# EAGLE board Simple-Bug-2N918 (EAGLE 7.7.0)
Simple FM Transmitter with Electret Microphone, using 2N918, an RF NPN Transistor
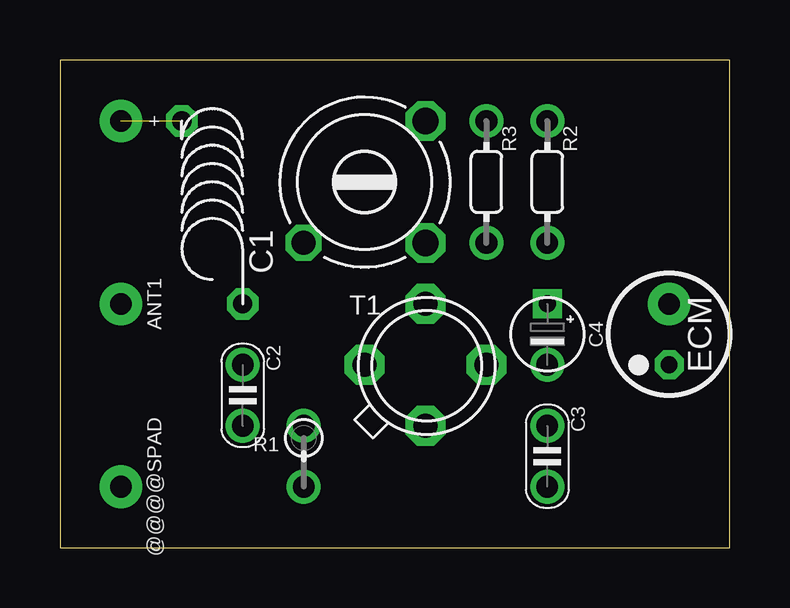
[diagram p0: board, top side]
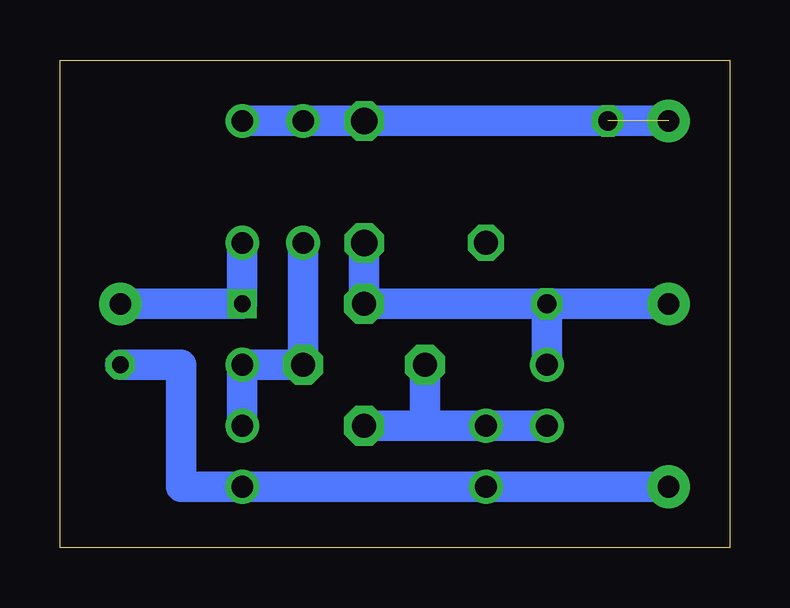
[diagram p1: board, bottom side, seen from below]

Size 27.92 x 20.32 mm. Coordinates in mm from the lower left corner, seen from the top.
Outline: 0,0 27.92,0 27.92,20.32 0,20.32 0,0
Copper layers (1*16): Top 0.035mm / dielectric 1.5mm / Bottom 0.035mm
Design rules "default": minimum track width 10mil, minimum drill 24mil, track to track 8mil, track to pad 8mil, pad to pad 8mil, via to via 8mil, smd to smd 8mil, copper to edge 40mil, drill to drill 8mil, minimum pad ring 10mil, minimum via ring 8mil, stop-mask expansion 4mil, vias tented up to drill 0mil, thermal gap 10mil
Net classes: 0 default: width 0.813 mm

## Footprints (pad centres in the part's own frame; a part is rotated, then mirrored left to right if it is on the bottom)
SPAD = drill 0.9 pad 1.778: 1 0,0
TRIM808-45 = drill 1.1 octagon: 1 2.54,-2.54; 2 -2.54,-2.54 | drill 1 octagon: 3 -2.54,2.54
C025-020X036 = drill 0.9: 1 0,0; 2 2.54,0
E2,5-3 = drill 0.7 square: + -1.27,0 | drill 0.9: - 1.27,0
ECM-5 = drill 0.7 pad 1.2 octagon: 1 0,1.27 | drill 0.9 pad 1.778: 2 0,-1.27
L-04/7 = drill 0.8 octagon: 1 -1.27,3.81; 2 1.27,-3.81
0202V = drill 0.9: 1 0,-1.27; 2 0,1.27
0202/5 = drill 0.9: 1 -2.54,0; 2 2.54,0
TO72-A45 = drill 1 pad 1.676 octagon: 1 0,-2.54; 2 2.54,0; 3 0,2.54; 4 -2.54,0

## Placement (x,y rotation side)
+  SPAD  [SPAD]  2.54,17.78 180 top
@@@@SPAD  SPAD  [SPAD]  2.54,2.54 180 top
ANT1  ANT  [SPAD]  2.54,10.16 180 top
C1  C-TR-PH20127-45-2P23  [TRIM808-45]  12.7,15.24 90 top
C2  4.7pF  [C025-020X036]  7.62,7.62 270 top
C3  1nF  [C025-020X036]  20.32,5.08 270 top
C4  [E2,5-3]  20.32,8.89 270 top
ECM  ECM-5  [ECM-5]  25.4,8.89 180 top
L1  1μH  [L-04/7]  6.35,13.97 0 top
R1  [0202V]  10.16,3.81 0 top
R2  22kΩ  [0202/5]  20.32,15.24 270 top
R3  47kΩ  [0202/5]  17.78,15.24 270 top
T1  2N918  [TO72-A45]  15.24,7.62 0 top

## Library data of the parts
+ @@@@SPAD ANT1 = pad
C1 = cap-trim
C2-C4 = c
ECM = ECM
L1 R1-R3 = r
T1 = t

## Nets
+UB: +.1 C1.1 L1.1 R2.1 R3.1
GND: C3.2 ECM.1 R1.1
N$1: ANT1.1 C1.2 C2.1 L1.2 T1.3
N$3: C2.2 R1.2 T1.1
N$5: C3.1 C4.- R3.2 T1.2
N$6: C4.+ ECM.2 R2.2

## Tracks (layer width: path | path; a pad name or v marks a point on that pad's centre or on a via)
+UB  (1 unrouted)
  Bottom 1.27: +.1 C1.1 R3.1 R2.1
GND
  Bottom 1.27: ECM.1 22.86,7.62 22.86,2.54 C3.2 R1.1 2.54,2.54
N$1
  Bottom 1.27: L1.2 T1.3 C1.2 | ANT1.1 L1.2 | L1.2 C2.1
N$3
  Bottom 1.27: R1.2 C2.2 12.7,5.08 | 12.7,7.62 12.7,5.08 | 12.7,5.08 T1.1
N$5
  Bottom 1.27: C3.1 C4.- T1.2 R3.2
N$6
  Bottom 1.27: ECM.2 C4.+ R2.2